# Altium PCB B302CA-PCIe.PcbDoc
Units mm, origin at the board's own origin, x right, y up, seen from the top; angles counter-clockwise.
Board outline 30 x 50.95 mm, 4 copper layers (Top Layer, Inner Layer 1, Inner Layer 2, Bottom Layer), stack 0.973 mm thick; 36 components, 27 nets, 160 pads, 77 vias.
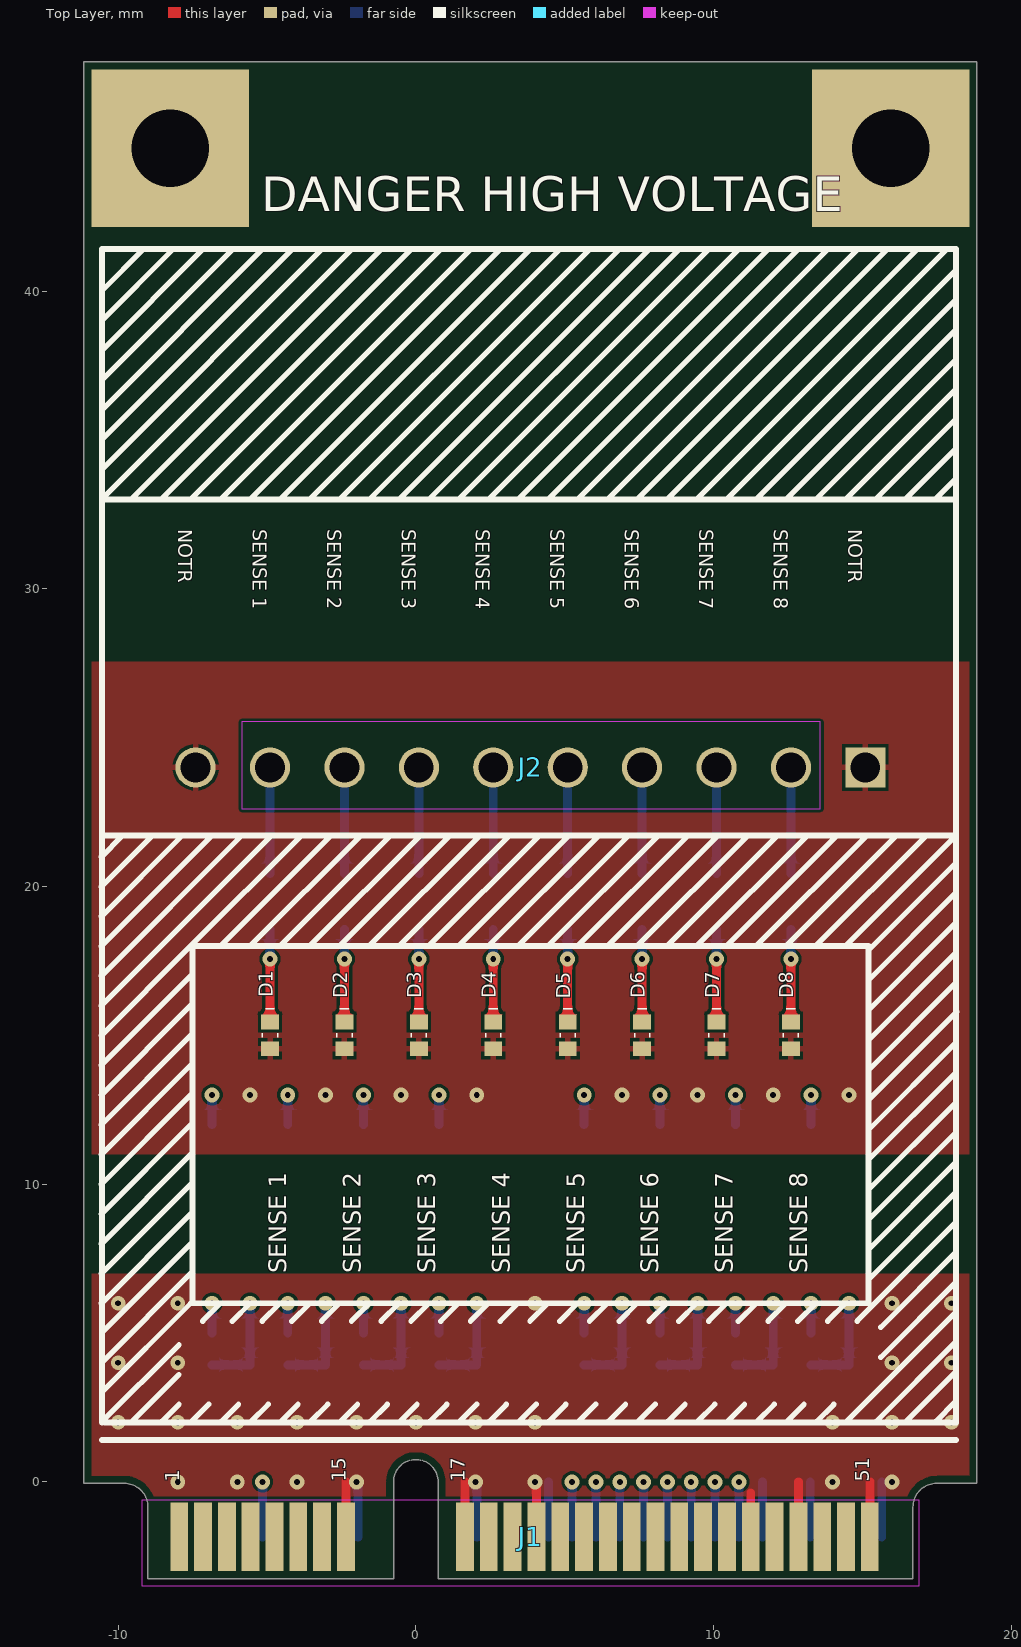
[diagram p0: Top Layer view]
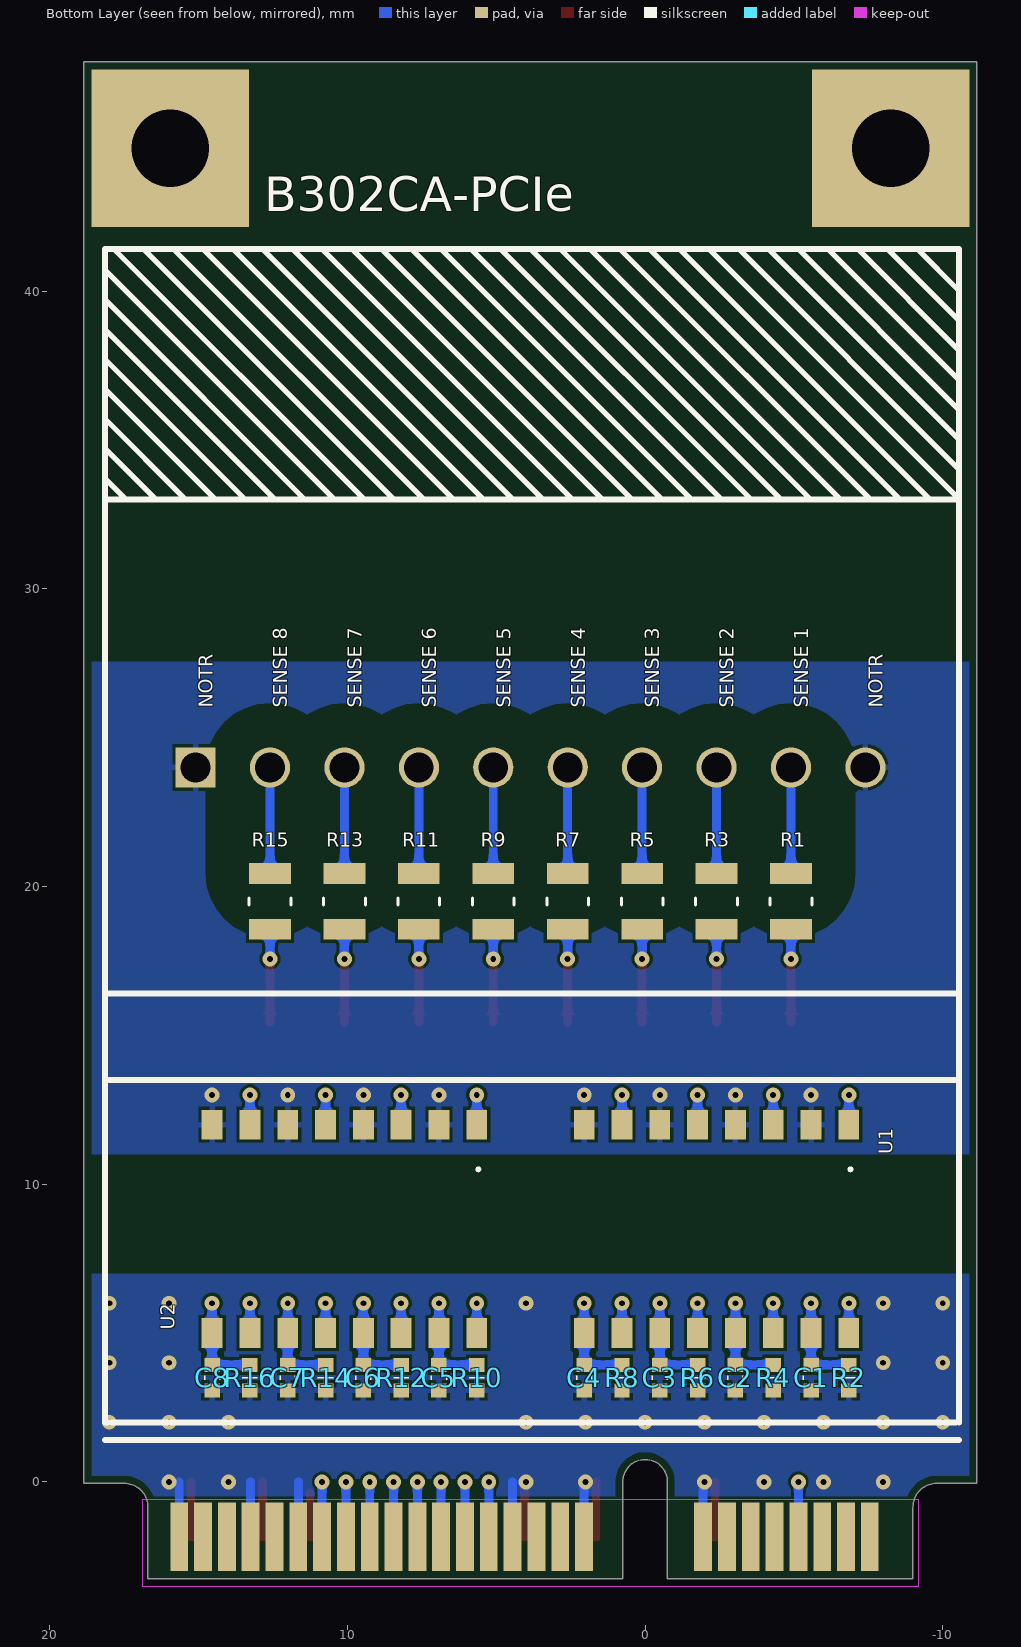
[diagram p1: Bottom Layer view, seen from below]
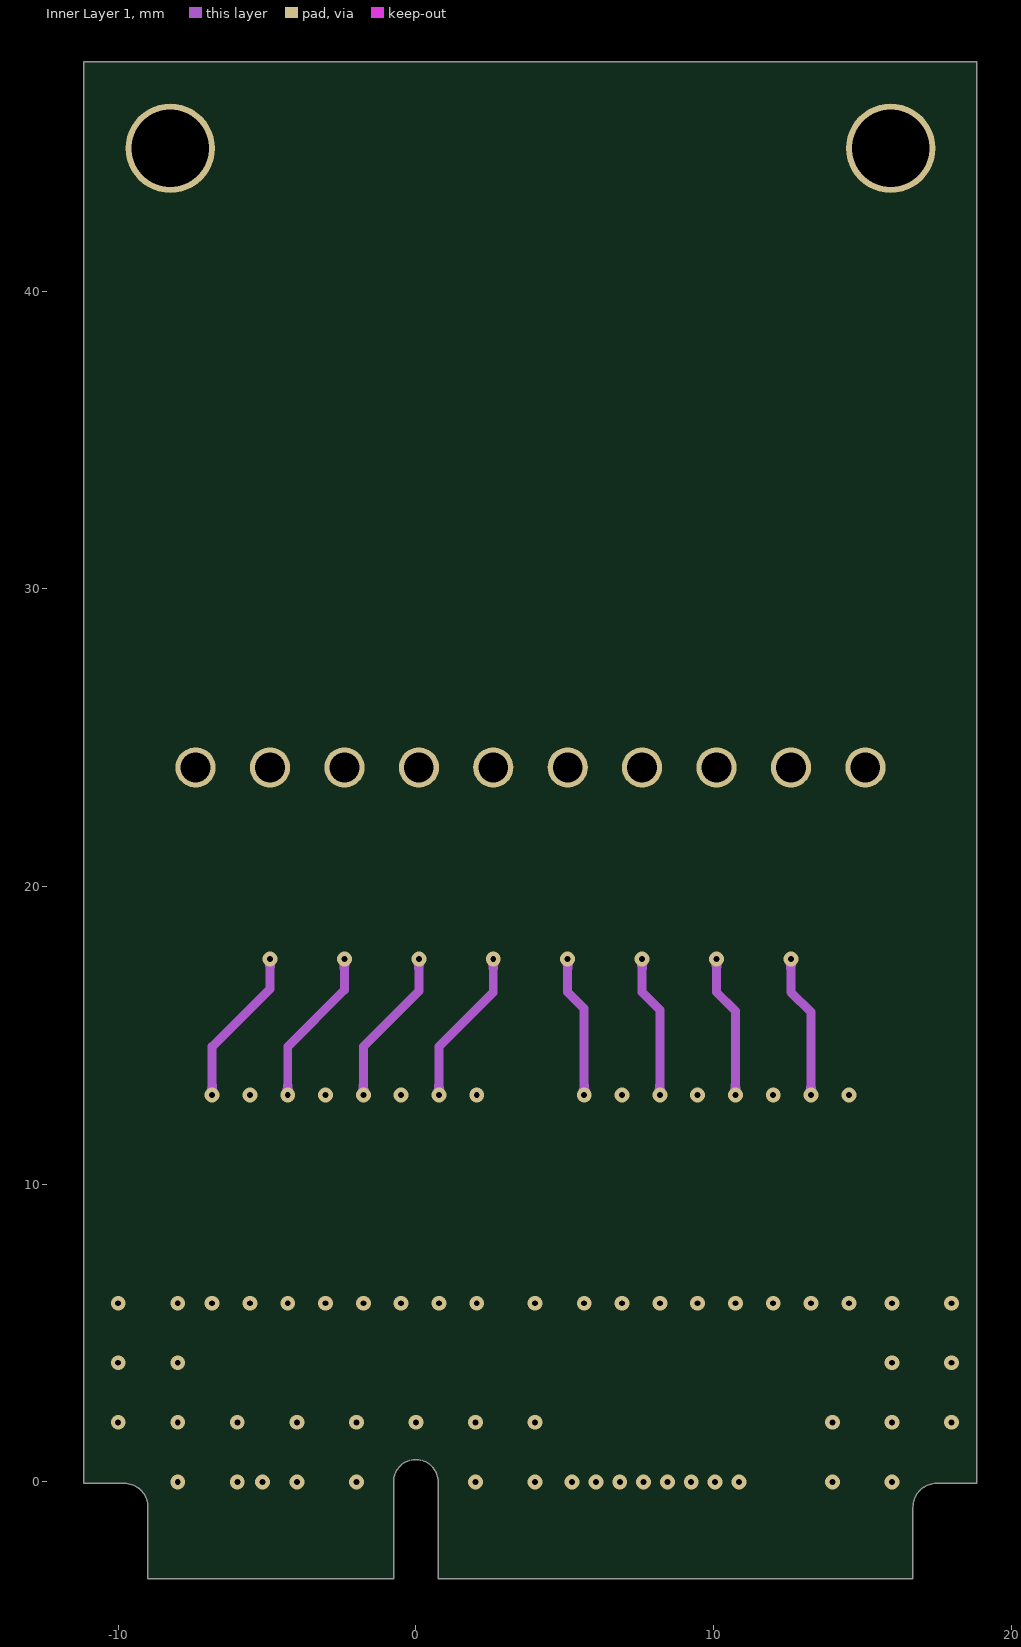
[diagram p2: Inner Layer 1]
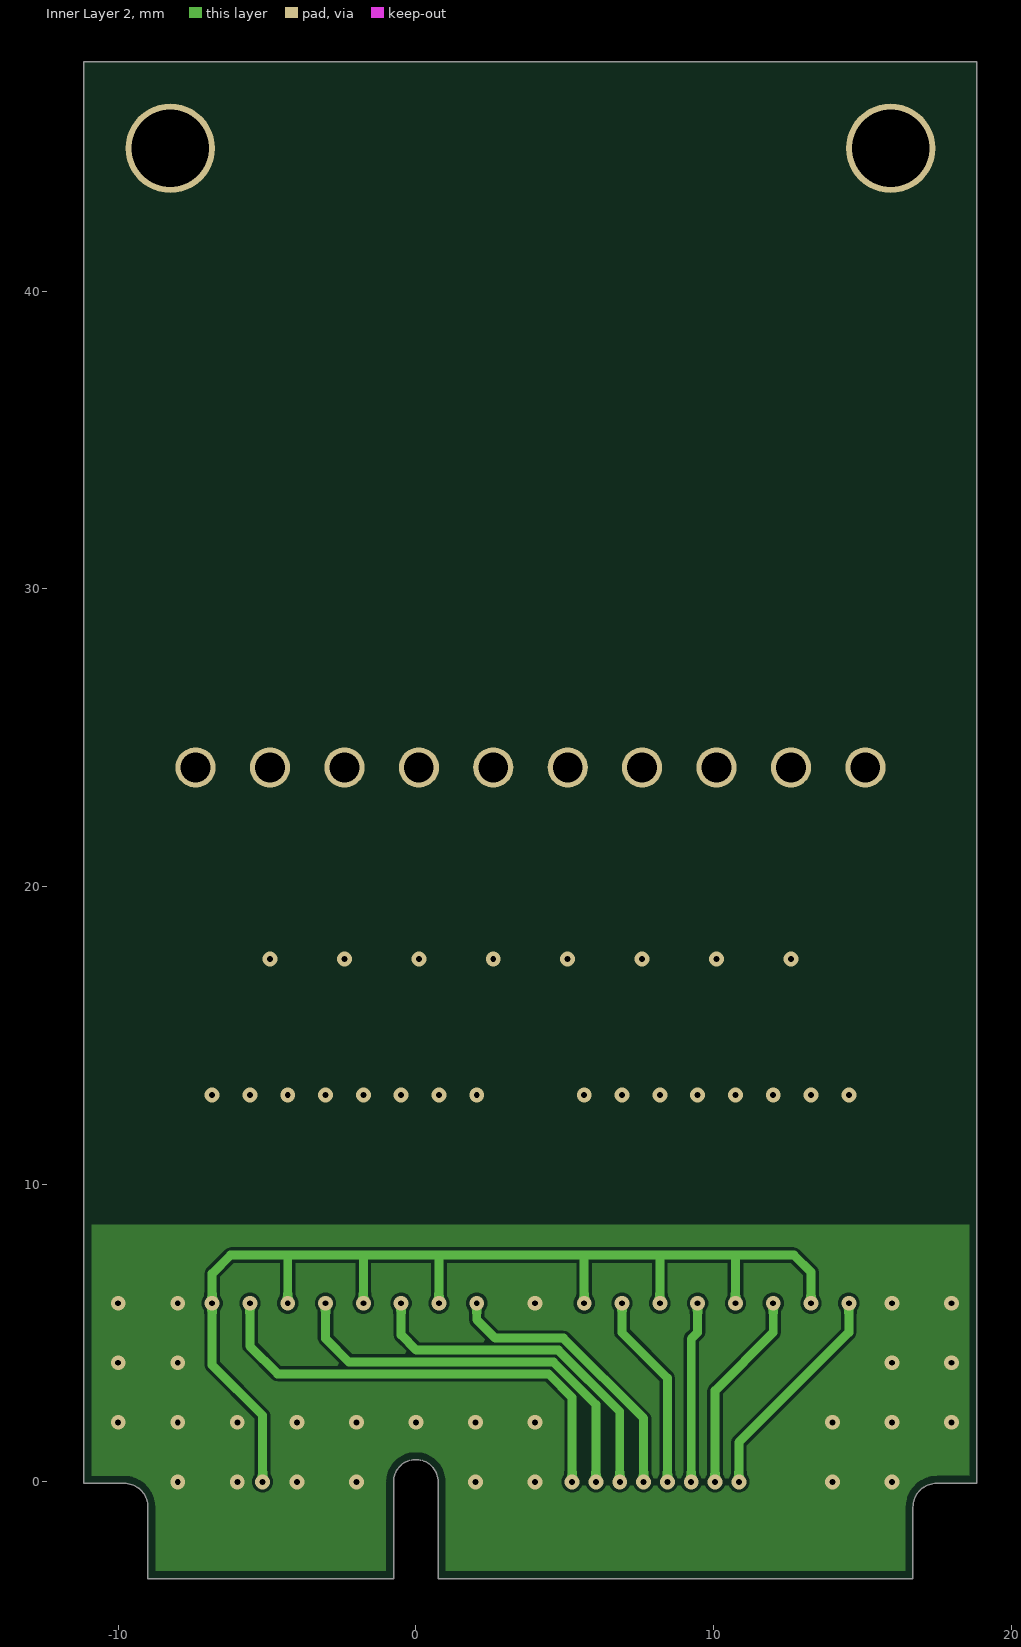
[diagram p3: Inner Layer 2]
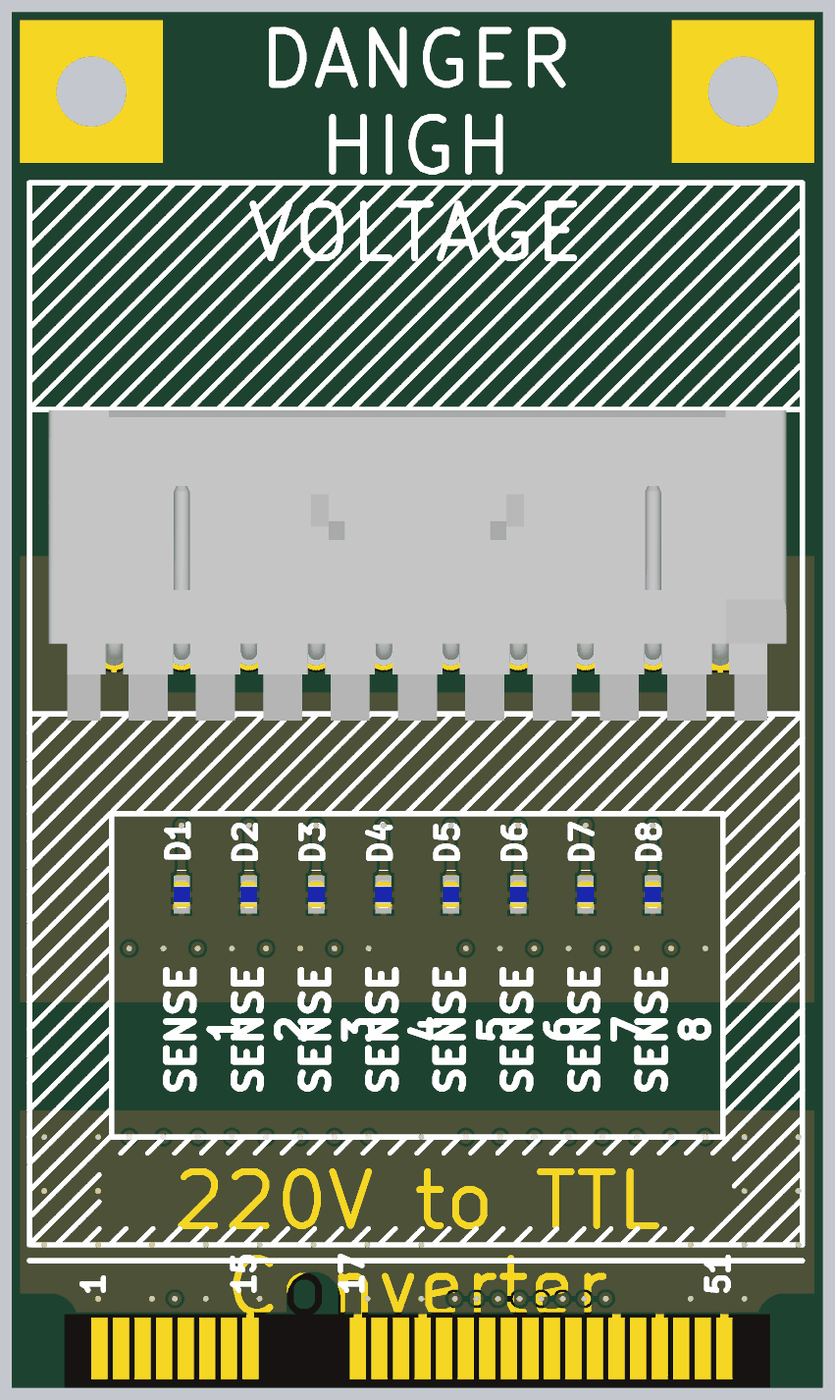
[diagram p4: 3D render of the assembled board from above, using the file's embedded part models]
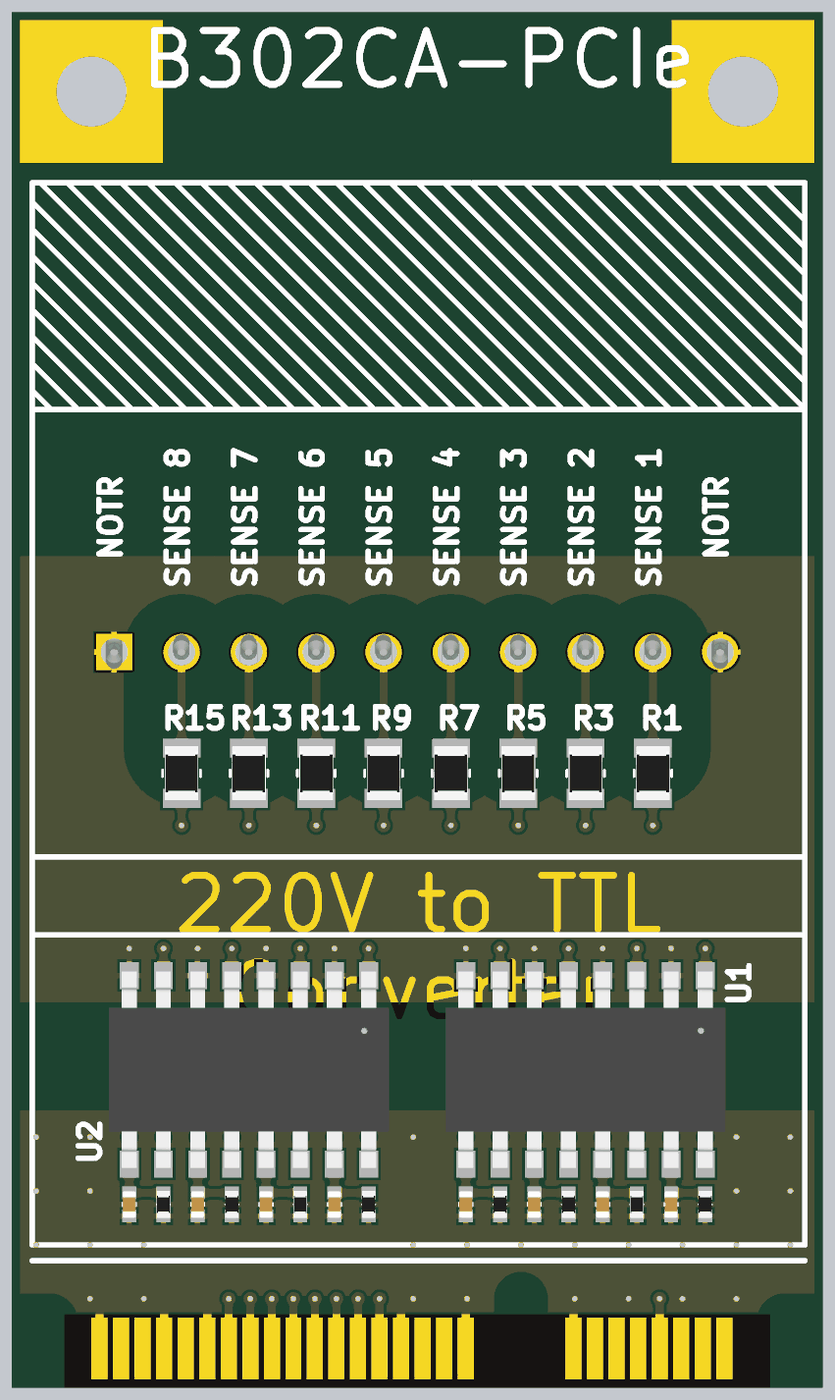
[diagram p5: 3D render of the assembled board from below, using the file's embedded part models]

## Layer stack, top to bottom
Top Solder: solder mask 0.0254, SM-001, Dk 4
Top Layer: signal copper 0.035
Dielectric 2: prepreg 0.1118, PP-015, Dk 4.3
Inner Layer 1: signal copper 0.035
Dielectric 1: core 0.6096, Core-038, Dk 4.6
Inner Layer 2: signal copper 0.035
Dielectric 3: prepreg 0.1118, PP-015, Dk 4.3
Bottom Layer: signal copper 0.035
Bottom Solder: solder mask 0.0254, SM-001, Dk 4

## Board outline
-9,-3.25 -9,-0.85 ccw(c-9.8,-0.85) -9.8,-0.05 -11.15,-0.05 -11.15,47.7 18.85,47.7 18.85,-0.05 17.5,-0.05 ccw(c17.5,-0.85) 16.7,-0.85 16.7,-3.25 0.75,-3.25 0.75,0 ccw(c0,0) -0.75,0 -0.75,-3.25

## Design rules (kind name [scope] priority, off if disabled: settings)
BoardOutlineClearance [All] p1: gap=0.25 ignorepadtopadclearanceinfootprint=FALSE except(0: Arc-SplitContinuation Track-SplitContinuation SMDPad-SplitContinuation THPad-SplitContinuation Via-SplitContinuation Fill-SplitContinuation Poly-SplitContinuation Region-SplitContinuation Text-SplitContinuation)
Clearance "Schematic Clearance Constraint" [InNetClass('HV')] p1: gap=0.254 ignorepadtopadclearanceinfootprint=FALSE except(0: Arc-Hole Track-Hole SMDPad-Hole THPad-Hole Via-Hole Fill-Hole Poly-Hole Region-Hole Text-Hole; 1: Arc-Arc Arc-Track Track-Track; 2: Arc-Fill Arc-Poly Arc-Region Track-Fill Track-Poly Track-Region)
Clearance Clearance-xPP-xTP-xTT [All] p2: gap=0.1 ignorepadtopadclearanceinfootprint=FALSE except(0: Arc-Hole Track-Hole SMDPad-Hole THPad-Hole Via-Hole Fill-Hole Poly-Hole Region-Hole Text-Hole)
ComponentClearance [All] p1: gap=0.25 collisioncheckmode=3 verticalgap=0.25 showdistances=FALSE
DiffPairsRouting [All] p1: maxlimit=0.25 minlimit=0.25 mostfreqgap=0.25 toplayer_minwidth=0.381 toplayer_maxwidth=0.381 toplayer_prefwidth=0.381 midlayer1_minwidth=0.381 midlayer1_maxwidth=0.381 midlayer1_prefwidth=0.381 midlayer2_minwidth=0.381 midlayer2_maxwidth=0.381 midlayer2_prefwidth=0.381 bottomlayer_minwidth=0.381 bottomlayer_maxwidth=0.381 bottomlayer_prefwidth=0.381 maxuncoupledlength=12.5
Height [All] p1: minheight=0 maxheight=25 prefheight=12.5
HoleSize HoleSize-PTH [All] p1: absolutevalues=TRUE maxlimit=5 minlimit=0.15 maxpercent=80.000 minpercent=20.000
HoleToHoleClearance [All] p1: gap=0.35 allowstackedmicrovias=TRUE
MinimumAnnularRing "Minimum IAR  <= 0.45mm" [((ObjectKind = 'Pad') OR (ObjectKind = 'Via')) And (Layer = 'MultiLayer') And (HoleDiameter <= AsMM(0.45))] p1: minimumring=0.125 // minimum inner annular ring for pads <= 0.45mm finished hole size
MinimumAnnularRing "Minimum IAR  > 0.45mm" [((ObjectKind = 'Pad') OR (ObjectKind = 'Via')) And (Layer = 'MultiLayer') And (HoleDiameter > AsMM(0.45))] p2: minimumring=0.125 // minimum inner annular ring for pads > 0.45mm finished hole size
MinimumAnnularRing Minimum-IAR [All] p3: minimumring=0.125
MinimumSolderMaskSliver [All] p1: minsoldermaskwidth=0.08
PlaneClearance [InNet('ANT_GSM')] p1: clearance=0.05
PlaneClearance PlaneClearance-IPI [All] p2: clearance=0.25
PlaneConnect [All] p1: planeconnectstyle=Relief reliefexpansion=0.175 reliefentries=4 reliefconductorwidth=0.2 reliefairgap=0.1
PolygonConnect PolygonConnect_Via [All vs (ObjectKind = 'Via') And (HoleDiameter <= AsMM(0.45))] p1: connectstyle=Direct reliefconductorwidth=0.254 reliefentries=4 polygonreliefangle="90 Angle" airgapwidth=0.254
PolygonConnect PolygonConnect-xTW [All] p2: connectstyle=Relief reliefconductorwidth=0.2 reliefentries=4 polygonreliefangle="90 Angle" airgapwidth=0.1
RoutingCorners [All] p1: cornerstyle=45-Degree minsetback=2.5 maxsetback=2.5
RoutingVias "RoutingVias <= 0.45mm" [(ObjectKind = 'Via') And (HoleDiameter <= AsMM(0.45))] p1: holewidth=0.2 width=0.55 viastyle="Through Hole" minholewidth=0.15 minwidth=0.5 maxholewidth=0.45 maxwidth=0.8
RoutingVias "RoutingVias > 0.45mm" [(ObjectKind = 'Via') And (HoleDiameter > AsMM(0.45))] p2: holewidth=0.5 width=0.85 viastyle="Through Hole" minholewidth=0.5 minwidth=0.85 maxholewidth=0.9 maxwidth=1.25
SilkToSilkClearance [All] p1: silktosilkclearance=0.2
SilkToSolderMaskClearance SilkscreenOverComponentPads [IsPad] p1: minsilkscreentomaskgap=0.1 clearancetoexposedcopper=TRUE
SolderMaskExpansion SolderMaskExpansion_Via [(ObjectKind = 'Via') And (HoleDiameter <= AsMM(0.45))] p1: expansion=0.01 istentingtop=TRUE soldermaskfromhole=TRUE
SolderMaskExpansion [All] p2: expansion=0.01 istentingtop=FALSE
SupplyNets "Schematic Supply Nets_2" [InNetClass('HV')] p1: voltage=220,0
SupplyNets "Schematic Supply Nets" [InNet('3V3')] p2: voltage=3,300
UnRoutedNet [All] p1: checkbadconnections=TRUE
Width Width-xTW [All] p1: maxlimit=1.5 minlimit=0.1 preferedwidth=0.2
18 further rules are at their usual default settings.

## Classes and differential pairs
net class HV: 220V_SENSE_1 220V_SENSE_2 220V_SENSE_3 220V_SENSE_4 220V_SENSE_5 220V_SENSE_6 220V_SENSE_7 220V_SENSE_8
component class "Optic Isolator 8": C8 D8 R15 R16
component class "Optic Isolator 7": C7 D7 R13 R14
component class "Optic Isolator 6": C6 D6 R11 R12
component class "Optic Isolator 5": C5 D5 R9 R10 U2
component class "Optic Isolator 4": C4 D4 R7 R8
component class "Optic Isolator 3": C3 D3 R5 R6
component class "Optic Isolator 2": C2 D2 R3 R4
component class "Optic Isolator 1": C1 D1 R1 R2 U1
component class "220V Sense Inputs": J2
component class "Card Edge Connector": J1

## Components (designator, comment, footprint, x,y, rotation, side; value= is the part's Value field where it differs from the comment)
C1 "Capacitor - 4.7uF [0402] (Ceramic)" CAPACITOR_0402 -5.575,3.5 r90 bottom value=4.7uF
C2 "Capacitor - 4.7uF [0402] (Ceramic)" CAPACITOR_0402 -3.035,3.5 r90 bottom value=4.7uF
C3 "Capacitor - 4.7uF [0402] (Ceramic)" CAPACITOR_0402 -0.495,3.5 r90 bottom value=4.7uF
C4 "Capacitor - 4.7uF [0402] (Ceramic)" CAPACITOR_0402 2.045,3.5 r90 bottom value=4.7uF
C5 "Capacitor - 4.7uF [0402] (Ceramic)" CAPACITOR_0402 6.925,3.5 r90 bottom value=4.7uF
C6 "Capacitor - 4.7uF [0402] (Ceramic)" CAPACITOR_0402 9.465,3.5 r90 bottom value=4.7uF
C7 "Capacitor - 4.7uF [0402] (Ceramic)" CAPACITOR_0402 12.005,3.5 r90 bottom value=4.7uF
C8 "Capacitor - 4.7uF [0402] (Ceramic)" CAPACITOR_0402 14.545,3.5 r90 bottom value=4.7uF
D1 "SMD LED (Green)" LED_0402 -4.9,15 r270 top
D2 "SMD LED (Green)" LED_0402 -2.4,15 r270 top
D3 "SMD LED (Green)" LED_0402 0.1,15 r270 top
D4 "SMD LED (Green)" LED_0402 2.6,15 r270 top
D5 "SMD LED (Green)" LED_0402 5.1,15 r270 top
D6 "SMD LED (Green)" LED_0402 7.6,15 r270 top
D7 "SMD LED (Green)" LED_0402 10.1,15 r270 top
D8 "SMD LED (Green)" LED_0402 12.6,15 r270 top
J1 "Connector - Mini PCI-E [Add-on]" "PCB - Mini PCI Express" 0,0 r0 top
J2 "53426-1010" "Connector 10P (2.54)" 3.85,24 r180 top
R1 "220K - 0805 - %5 - 1/16W" RESISTOR_0805 -4.9,19.5 r90 bottom value=220K
R2 "47K - 0402 - %1 - 1/16W" RESISTOR_0402 -6.845,3.5 r90 bottom value=47K
R3 "220K - 0805 - %5 - 1/16W" RESISTOR_0805 -2.4,19.5 r90 bottom value=220K
R4 "47K - 0402 - %1 - 1/16W" RESISTOR_0402 -4.305,3.5 r90 bottom value=47K
R5 "220K - 0805 - %5 - 1/16W" RESISTOR_0805 0.1,19.5 r90 bottom value=220K
R6 "47K - 0402 - %1 - 1/16W" RESISTOR_0402 -1.765,3.5 r90 bottom value=47K
R7 "220K - 0805 - %5 - 1/16W" RESISTOR_0805 2.6,19.5 r90 bottom value=220K
R8 "47K - 0402 - %1 - 1/16W" RESISTOR_0402 0.775,3.5 r90 bottom value=47K
R9 "220K - 0805 - %5 - 1/16W" RESISTOR_0805 5.1,19.5 r90 bottom value=220K
R10 "47K - 0402 - %1 - 1/16W" RESISTOR_0402 5.655,3.5 r90 bottom value=47K
R11 "220K - 0805 - %5 - 1/16W" RESISTOR_0805 7.6,19.5 r90 bottom value=220K
R12 "47K - 0402 - %1 - 1/16W" RESISTOR_0402 8.195,3.5 r90 bottom value=47K
R13 "220K - 0805 - %5 - 1/16W" RESISTOR_0805 10.1,19.5 r90 bottom value=220K
R14 "47K - 0402 - %1 - 1/16W" RESISTOR_0402 10.735,3.5 r90 bottom value=47K
R15 "220K - 0805 - %5 - 1/16W" RESISTOR_0805 12.6,19.5 r90 bottom value=220K
R16 "47K - 0402 - %1 - 1/16W" RESISTOR_0402 13.275,3.5 r90 bottom value=47K
U1 "TCMT4100" SO-16 -2.4,8.5 r270 bottom
U2 "TCMT4100" SO-16 10.1,8.5 r270 bottom

## Footprints (in the part's own frame and the unit in brackets; to place one, negate y for a bottom-side part, rotate by r counter-clockwise, add the part's x,y. Pads: shape width x height; smd on the part's side, far side on the other; paste and mask are expansions set on the pad)
CAPACITOR_0402 [mm] "Chip Capacitor, IPC High Density"
  rect 0.47x0.52 smd mask+0.01: 1(-0.43,0) 2(0.43,0)
  silkscreen extent -0.06,-0.25 0.06,0.25, body extent -0.5,-0.25 0.5,0.25, height 0.49
"Connector 10P (2.54)" [mm] "10P Tunic Connector"
  rect 1.35x1.35 / inner round 1.35 / far side rect 1.35x1.35 hole 1 mask+0.076: 1(-11.25,0)
  round 1.35 hole 1 mask+0.076: 2(-8.75,0) 3(-6.25,0) 4(-3.75,0) 5(-1.25,0) 6(1.25,0) 7(3.75,0) 8(6.25,0) 9(8.75,0) 10(11.25,0)
  body extent -13.71,-8.96 13.69,2.54, height 6.65
LED_0402 [mm] "LED, IPC High Density"
  rect 0.5x0.6 smd mask+0.01: 1(-0.45,0) 2(0.45,0)
  silkscreen extent -0.9,-0.25 0.06,0.25, body extent -0.5,-0.3 0.5,0.3, height 0.18
"PCB - Mini PCI Express" [mm]
  rect 0.6x2.3 smd paste-0.9: 1(-7.95,-1.85) 3(-7.15,-1.85) 5(-6.35,-1.85) 7(-5.55,-1.85) 9(-4.75,-1.85) 11(-3.95,-1.85) 13(-3.15,-1.85) 15(-2.35,-1.85) 17(1.65,-1.85) 19(2.45,-1.85) 21(3.25,-1.85) 23(4.05,-1.85) 25(4.85,-1.85) 27(5.65,-1.85) 29(6.45,-1.85) 31(7.25,-1.85) 33(8.05,-1.85) 35(8.85,-1.85) 37(9.65,-1.85) 39(10.45,-1.85) 41(11.25,-1.85) 43(12.05,-1.85) 45(12.85,-1.85) 47(13.65,-1.85) 49(14.45,-1.85) 51(15.25,-1.85)
  rect 0.6x2.3 smd far side paste-0.9: 2(-7.55,-1.85) 4(-6.75,-1.85) 6(-5.95,-1.85) 8(-5.15,-1.85) 10(-4.35,-1.85) 12(-3.55,-1.85) 14(-2.75,-1.85) 16(-1.95,-1.85) 18(2.05,-1.85) 20(2.85,-1.85) 22(3.65,-1.85) 24(4.45,-1.85) 26(5.25,-1.85) 28(6.05,-1.85) 30(6.85,-1.85) 32(7.65,-1.85) 34(8.45,-1.85) 36(9.25,-1.85) 38(10.05,-1.85) 40(10.85,-1.85) 42(11.65,-1.85) 44(12.45,-1.85) 46(13.25,-1.85) 48(14.05,-1.85) 50(14.85,-1.85) 52(15.65,-1.85)
  Top Layer keep-out region: -9.2,-0.6 16.9,-0.6 16.9,-3.5 -9.2,-3.5
  Bottom Layer keep-out region: -9.2,-0.6 16.9,-0.6 16.9,-3.5 -9.2,-3.5
RESISTOR_0402 [mm] "Chip Resistor, IPC High Density"
  rect 0.47x0.52 smd mask+0.01: 1(-0.43,0) 2(0.43,0)
  silkscreen extent 0,-0.25 0,0.25, body extent -0.5,-0.25 0.5,0.25, height 0.35
RESISTOR_0805 [mm] "Chip Resistor, IPC High Density"
  rect 0.7x1.4 smd mask+0.01: 1(-0.935,0) 2(0.935,0)
  silkscreen extent -0.12,-0.7 0.12,0.7, body extent -1,-0.63 1,0.63, height 0.45
SO-16 [mm]
  rect 1x0.7 smd mask+0.01: 1(-3.5,4.445) 2(-3.5,3.175) 3(-3.5,1.905) 4(-3.5,0.635) 5(-3.5,-0.635) 6(-3.5,-1.905) 7(-3.5,-3.175) 8(-3.5,-4.445) 9(3.5,-4.445) 10(3.5,-3.175) 11(3.5,-1.905) 12(3.5,-0.635) 13(3.5,0.635) 14(3.5,1.905) 15(3.5,3.175) 16(3.5,4.445)
  silkscreen extent -2.05,4.45 -1.95,4.55, body extent -3.64,-5.19 3.64,5.19, height 2.11

## Part data
C1 C2 C3 C4 C5 C6 C7 C8: library part "Capacitor - 4.7uF [0402-6V3]", "Multilayer Ceramic Capacitors - SMD - 6V3 4.7uF X5R 0402 20%", Case=0402, Manufacturer Name=KEMET, Manufacturer Part Number=C0402C475M9PACTU, Tolerance=20%, Voltage=6V3
D1 D2 D3 D4 D5 D6 D7 D8: library part "Diode - LED (0402-Green)", "Standard LEDs - SMD MINI-MOLD ULTRA COMPACT GREEN", Case=0402, Color=Green, Manufacturer Name="ROHM Semiconductor", Manufacturer Part Number=SML-P12MTT86R, ComponentLink1Description=DataSheet, ComponentLink1URL=https://www.mouser.com.tr/datasheet/2/348/sml-p1-e-1139198.pdf, ComponentLink2Description=Mouser, ComponentLink2URL=https://www.mouser.com.tr/ProductDetail/ROHM-Semiconductor/SML-P12U2TT86R?qs=sGAEpiMZZMseGfSY3csMkRIBDsfU3UCXJTULB5gem9Ta%252Bp%252BvZ709fg%3D%3D, RoHS=Yes
J1: "Mini PCI-Express gold finger connector.", BUS Type="Mini PCI Express", Mating Connector=TE-1775862-2, Number of Positions=52, Pitch="0.8 mm", System=Connector
J2: library part "Connector - Tunic 10P (2.5)", "2.50mm Pitch Mini-Lock Wire-to-Board Header Right Angle Friction and Positive Lock 10 Circuits", Case=TH, Manufacturer Name=Molex, Manufacturer Part Number=53426-1010, Pitch=2.5mm, Position="10 Position", System=Connector
R1 R3 R5 R7 R9 R11 R13 R15: library part "Resistor - 220K [0805]", "Thick Film Resistors - SMD 1/2 W 220 KOhm 5%", Case=0805, Manufacturer Name="Vishay Dale", Manufacturer Part Number=CRCW0805220KJNEAHP, Power=1/2W, Tolerance=%5, ComponentLink1Description=DataSheet, ComponentLink1URL=https://www.mouser.com.tr/datasheet/2/427/dcrcwe3-1762152.pdf, ComponentLink2Description=Mouser, ComponentLink2URL=https://www.mouser.com.tr/ProductDetail/Vishay-Dale/CRCW0402330RFKED?qs=sGAEpiMZZMu61qfTUdNhG2DpbjADlD3GGS6SwBlLi5Q%3D
R2 R4 R6 R8 R10 R12 R14 R16: library part "Resistor - 47K [0402]", "Thick Film Resistors - SMD 1/16 W 47 KOhm 1%", Case=0402, Manufacturer Name=Vishay, Manufacturer Part Number=CRCW040247K0FKED, Power=1/16W, Tolerance=%1, ComponentLink1Description=DataSheet, ComponentLink1URL=https://www.mouser.com.tr/datasheet/2/427/dcrcwe3-1762152.pdf, ComponentLink2Description=Mouser, ComponentLink2URL=https://www.mouser.com.tr/ProductDetail/Vishay-Dale/CRCW040247K0FKED?qs=sGAEpiMZZMu61qfTUdNhG2DpbjADlD3GL%252B3h1elTxqU%3D
U1 U2: library part "IC - TCMT4100", "OptpCoupler 4CH 16 Pin (SOP16)", Case=SOP-16, Manufacturer Name="Vishay Semiconductors", Maximum Collector Emitter Saturation Voltage="0.3 V", Vf - Forward Voltage="1.6 V", If - Forward Current="60 mA", Manufacturer Part Number=TCMT4100, Number of Channels="4 Channel"

## Free pads (board coordinates)
  rect 5.3x5.3 / inner round 3 / far side rect 5.3x5.3 hole 2.6: 1(-8.25,44.8) 2(15.95,44.8)

## Via types
v1: diameter 0.5, hole 0.2, Top Layer to Bottom Layer, tented both sides, 77 vias

## Nets (pads, with @x,y where several pads share a name; then routed paths per layer and width w, separated by ;. In a path a pad name is that pad's centre, name@x,y a point inside that pad or via, vN(x,y) a via of type N, cw(c..) or ccw(c..) an arc to the next point about the centre after c; other vN are vias at no path point)
3V3: J1.8 U1.10 U1.12 U1.14 U1.16 U2.10 U2.12 U2.14 U2.16 | length 48.9
  Inner Layer 2 w0.3: v1(-5.15,0) -5.15,2.229 -6.845,3.924 v1(-6.845,6) -6.845,6.998 -6.223,7.62 -4.318,7.62 ; v1(-4.305,6) -4.305,7.607 -4.318,7.62 ; v1(-1.765,6) -1.765,7.607 ; v1(0.775,6) 0.775,7.607 ; v1(5.655,6) 5.655,7.607 ; v1(8.195,6) 8.195,7.607 ; v1(10.735,6) 10.735,7.607 ; v1(13.275,6) 13.275,7.045 12.7,7.62 -4.318,7.62
  Bottom Layer w0.3: U1.16 v1(-6.845,6) ; J1.8 v1(-5.15,0) ; U1.14 v1(-4.305,6) ; U1.12 v1(-1.765,6) ; U1.10 v1(0.775,6) ; U2.16 v1(5.655,6) ; U2.14 v1(8.195,6) ; U2.12 v1(10.735,6) ; U2.10 v1(13.275,6)
3V3_SENSE_1: C1.2 J1.26 R2.2 U1.15 | length 21
  Inner Layer 2 w0.3: v1(-5.575,6) -5.575,4.559 -4.642,3.626 4.456,3.626 5.25,2.832 v1(5.25,0)
  Bottom Layer w0.3: R2.2 C1.2 U1.15 v1(-5.575,6) ; J1.26 v1(5.25,0)
3V3_SENSE_2: C2.2 J1.28 R4.2 U1.13 | length 19
  Inner Layer 2 w0.3: v1(-3.035,6) -3.035,4.813 -2.248,4.026 4.622,4.026 6.05,2.598 v1(6.05,0)
  Bottom Layer w0.3: R4.2 C2.2 U1.13 v1(-3.035,6) ; J1.28 v1(6.05,0)
3V3_SENSE_3: C3.2 J1.30 R6.2 U1.11 | length 17
  Inner Layer 2 w0.3: v1(-0.495,6) -0.495,4.94 0.019,4.426 4.787,4.426 6.85,2.363 v1(6.85,0)
  Bottom Layer w0.3: R6.2 C3.2 U1.11 v1(-0.495,6) ; J1.30 v1(6.85,0)
3V3_SENSE_4: C4.2 J1.32 R8.2 U1.9 | length 14.9
  Inner Layer 2 w0.3: v1(2.045,6) 2.045,5.448 2.667,4.826 4.953,4.826 7.65,2.129 v1(7.65,0)
  Bottom Layer w0.3: R8.2 C4.2 U1.9 v1(2.045,6) ; J1.32 v1(7.65,0)
3V3_SENSE_5: C5.2 J1.34 R10.2 U2.15 | length 11.8
  Inner Layer 2 w0.3: v1(6.925,6) 6.925,5.013 8.45,3.488 v1(8.45,0)
  Bottom Layer w0.3: R10.2 C5.2 U2.15 v1(6.925,6) ; J1.34 v1(8.45,0)
3V3_SENSE_6: C6.2 J1.36 R12.2 U2.13 | length 11.3
  Inner Layer 2 w0.3: v1(9.25,0) 9.25,4.805 9.465,5.02 v1(9.465,6)
  Bottom Layer w0.3: R12.2 C6.2 U2.13 v1(9.465,6) ; J1.36 v1(9.25,0)
3V3_SENSE_7: C7.2 J1.38 R14.2 U2.11 | length 12
  Inner Layer 2 w0.3: v1(10.05,0) 10.05,3.065 12.005,5.02 v1(12.005,6)
  Bottom Layer w0.3: J1.38 v1(10.05,0) ; R14.2 C7.2 U2.11 v1(12.005,6)
3V3_SENSE_8: C8.2 J1.40 R16.2 U2.9 | length 12.7
  Inner Layer 2 w0.3: v1(10.85,0) 10.85,1.325 14.545,5.02 v1(14.545,6)
  Bottom Layer w0.3: J1.40 v1(10.85,0) ; R16.2 C8.2 U2.9 v1(14.545,6)
220V_SENSE_1: J2.9 R1.2 | length 3.6
  Bottom Layer w0.3: R1.2 J2.9
220V_SENSE_1_: D1.1 R1.1 U1.1 | length 9.5
  Top Layer w0.3: D1.1 v1(-4.9,17.565)
  Inner Layer 1 w0.3: v1(-6.845,13) -6.845,14.618 -4.9,16.563 v1(-4.9,17.565)
  Bottom Layer w0.3: U1.1 v1(-6.845,13) ; v1(-4.9,17.565) R1.1
220V_SENSE_2: J2.8 R3.2 | length 3.6
  Bottom Layer w0.3: R3.2 J2.8
220V_SENSE_2_: D2.1 R3.1 U1.3 | length 9.5
  Top Layer w0.3: D2.1 v1(-2.4,17.565)
  Inner Layer 1 w0.3: v1(-4.305,13) -4.305,14.618 -2.4,16.523 v1(-2.4,17.565)
  Bottom Layer w0.3: U1.3 v1(-4.305,13) ; v1(-2.4,17.565) R3.1
220V_SENSE_3: J2.7 R5.2 | length 3.6
  Bottom Layer w0.3: R5.2 J2.7
220V_SENSE_3_: D3.1 R5.1 U1.5 | length 9.5
  Top Layer w0.3: D3.1 v1(0.1,17.565)
  Inner Layer 1 w0.3: v1(-1.765,13) -1.765,14.618 0.1,16.483 v1(0.1,17.565)
  Bottom Layer w0.3: U1.5 v1(-1.765,13) ; v1(0.1,17.565) R5.1
220V_SENSE_4: J2.6 R7.2 | length 3.6
  Bottom Layer w0.3: R7.2 J2.6
220V_SENSE_4_: D4.1 R7.1 U1.7 | length 9.4
  Top Layer w0.3: D4.1 v1(2.6,17.565)
  Inner Layer 1 w0.3: v1(0.775,13) 0.775,14.618 2.6,16.443 v1(2.6,17.565)
  Bottom Layer w0.3: U1.7 v1(0.775,13) ; v1(2.6,17.565) R7.1
220V_SENSE_5: J2.5 R9.2 | length 3.6
  Bottom Layer w0.3: R9.2 J2.5
220V_SENSE_5_: D5.1 R9.1 U2.1 | length 8.9
  Top Layer w0.3: D5.1 v1(5.1,17.565)
  Inner Layer 1 w0.3: v1(5.1,17.565) 5.1,16.455 5.655,15.9 v1(5.655,13)
  Bottom Layer w0.3: v1(5.1,17.565) R9.1 ; U2.1 v1(5.655,13)
220V_SENSE_6: J2.4 R11.2 | length 3.6
  Bottom Layer w0.3: R11.2 J2.4
220V_SENSE_6_: D6.1 R11.1 U2.3 | length 8.9
  Top Layer w0.3: D6.1 v1(7.6,17.565)
  Inner Layer 1 w0.3: v1(7.6,17.565) 7.6,16.455 8.195,15.86 v1(8.195,13)
  Bottom Layer w0.3: v1(7.6,17.565) R11.1 ; U2.3 v1(8.195,13)
220V_SENSE_7: J2.3 R13.2 | length 3.6
  Bottom Layer w0.3: R13.2 J2.3
220V_SENSE_7_: D7.1 R13.1 U2.5 | length 8.9
  Top Layer w0.3: D7.1 v1(10.1,17.565)
  Inner Layer 1 w0.3: v1(10.1,17.565) 10.1,16.455 10.735,15.82 v1(10.735,13)
  Bottom Layer w0.3: v1(10.1,17.565) R13.1 ; U2.5 v1(10.735,13)
220V_SENSE_8: J2.2 R15.2 | length 3.6
  Bottom Layer w0.3: R15.2 J2.2
220V_SENSE_8_: D8.1 R15.1 U2.7 | length 9
  Top Layer w0.3: D8.1 v1(12.6,17.565)
  Inner Layer 1 w0.3: v1(12.6,17.565) 12.6,16.455 13.275,15.78 v1(13.275,13)
  Bottom Layer w0.3: v1(12.6,17.565) R15.1 ; U2.7 v1(13.275,13)
GND: C1.1 C2.1 C3.1 C4.1 C5.1 C6.1 C7.1 C8.1 J1.15 J1.16 J1.17 J1.18 J1.23 J1.24 J1.41 J1.42 J1.45 J1.46 J1.51 J1.52 R2.1 R4.1 R6.1 R8.1 R10.1 R12.1 R14.1 R16.1 | length 21.8
  Top Layer w0.3: J1.15 -2.35,0 ; J1.17 1.65,0 ; J1.23 v1@4.05,0 ; J1.41 11.25,-0.381 ; J1.45 12.85,0 ; J1.51 15.25,0
  Bottom Layer w0.3: J1.16 v1@-1.95,0 ; J1.18 v1@2.05,0 ; J1.24 4.45,0 ; J1.42 11.65,0 ; J1.46 13.25,0 ; J1.52 15.65,0
  other v1: -8,0 -6,0 -4,0 -2,0 2,0 4,0 14,0 16,0 -10,2 -8,2 -6,2 -4,2 -2,2 0,2 2,2 4,2 14,2 16,2 18,2 -10,4 -8,4 16,4 18,4 -10,6 -8,6 4,6 16,6 18,6
NOTR: D1.2 D2.2 D3.2 D4.2 D5.2 D6.2 D7.2 D8.2 J2.1 J2.10 U1.2 U1.4 U1.6 U1.8 U2.2 U2.4 U2.6 U2.8
  other v1: -5.575,13 -3.035,13 -0.495,13 2.045,13 6.925,13 9.465,13 12.005,13 14.545,13
pads on no net: J1.1 J1.2 J1.3 J1.4 J1.5 J1.6 J1.7 J1.9 J1.10 J1.11 J1.12 J1.13 J1.14 J1.19 J1.20 J1.21 J1.22 J1.25 J1.27 J1.29 J1.31 J1.33 J1.35 J1.37 J1.39 J1.43 J1.44 J1.47 J1.48 J1.49 J1.50

## Polygon pours and split planes (outlines as drawn)
GND on Bottom Layer "BGND" (solid, pour order 4): -11.15,6.985 18.85,6.985 18.85,-3.25 -11.15,-3.25
NOTR on Bottom Layer "TNOTR" (solid, pour order 3): -11.15,27.559 18.85,27.559 18.85,11 -11.15,11
NOTR on Top Layer "TNOTR" (solid, pour order 2): -11.15,27.559 18.85,27.559 18.85,11 -11.15,11
GND on Top Layer "TGND" (solid, pour order 1): -11.15,6.985 18.85,6.985 18.85,-3.25 -11.15,-3.25
GND on Inner Layer 2 "BGND" (solid, pour order 0): -11.15,8.636 18.85,8.636 18.85,-3.25 -11.15,-3.25

## Keep-outs
Top Layer:
  rectangle: -5.842,22.606 13.589,25.527

## Silkscreen, mask and mechanical layers (free items; w line width, h text height)
Top Overlay:
  drawing of 155 lines, arcs and shapes, not listed
  text "DANGER HIGH VOLTAGE" at -5.2,42.3 h2
  text "NOTR" at -8.15,32 h0.8 r270
  text "SENSE 1" at -5.65,32 h0.8 r270
  text "SENSE 2" at -3.15,32 h0.8 r270
  text "SENSE 3" at -0.65,32 h0.8 r270
  text "SENSE 4" at 1.85,32 h0.8 r270
  text "SENSE 5" at 4.35,32 h0.8 r270
  text "SENSE 6" at 6.85,32 h0.8 r270
  text "SENSE 7" at 9.35,32 h0.8 r270
  text "SENSE 8" at 11.85,32 h0.8 r270
  text "NOTR" at 14.35,32 h0.8 r270
  text "SENSE 1" at -4.15,7 h1 r90
  text "SENSE 2" at -1.65,7 h1 r90
  text "SENSE 3" at 0.85,7 h1 r90
  text "SENSE 4" at 3.35,7 h1 r90
  text "SENSE 5" at 5.85,7 h1 r90
  text "SENSE 6" at 8.35,7 h1 r90
  text "SENSE 7" at 10.85,7 h1 r90
  text "SENSE 8" at 13.35,7 h1 r90
Bottom Overlay:
  lines w0.18: -10.557,33.007 -2.15,41.414 ; -10.55,34.014 -3.15,41.414 ; -10.55,35.014 -4.15,41.414 ; -10.55,36.014 -5.15,41.414 ; -10.55,37.014 -6.15,41.414 ; -10.55,38.014 -7.15,41.414 ; -10.55,39.014 -8.15,41.414 ; -10.55,40.014 -9.15,41.414 ; -9.55,33.014 -1.15,41.414 ; -8.55,33.014 -0.15,41.414 ; -7.55,33.014 0.85,41.414 ; -6.55,33.014 1.85,41.414 ; -5.55,33.014 2.85,41.414 ; -4.55,33.014 3.85,41.414 ; -3.55,33.014 4.85,41.414 ; -2.55,33.014 5.85,41.414 ; -1.55,33.014 6.85,41.414 ; -0.55,33.014 7.85,41.414 ; 0.45,33.014 8.85,41.414 ; 1.45,33.014 9.85,41.414 ; 2.45,33.014 10.85,41.414 ; 3.45,33.014 11.85,41.414 ; 4.45,33.014 12.85,41.414 ; 5.45,33.014 13.85,41.414 ; 6.45,33.014 14.85,41.414 ; 7.45,33.014 15.85,41.414 ; 8.45,33.014 16.85,41.414 ; 9.45,33.014 17.85,41.414 ; 10.45,33.014 18.15,40.714 ; 11.45,33.014 18.15,39.714 ; 12.45,33.014 18.15,38.714 ; 13.45,33.014 18.15,37.714 ; 14.45,33.014 18.15,36.714 ; 15.45,33.014 18.15,35.714 ; 16.45,33.014 18.15,34.714 ; 17.45,33.014 18.15,33.714
  lines w0.2: -10.55,1.413 18.15,1.413 ; -10.55,2 -10.55,41.414 18.15,41.414 18.15,2 -10.452,2 ; -10.55,13.5 18.15,13.5 ; -10.55,16.4 18.15,16.4 ; -10.55,33 18.15,33
  text "B302CA-PCIe" at 12.8,42.3 h2
  text "NOTR" at -8.15,26 h0.8 r270
  text "SENSE 1" at -5.65,26 h0.8 r270
  text "SENSE 2" at -3.15,26 h0.8 r270
  text "SENSE 3" at -0.65,26 h0.8 r270
  text "SENSE 4" at 1.85,26 h0.8 r270
  text "SENSE 5" at 4.35,26 h0.8 r270
  text "SENSE 6" at 6.85,26 h0.8 r270
  text "SENSE 7" at 9.35,26 h0.8 r270
  text "SENSE 8" at 11.85,26 h0.8 r270
  text "NOTR" at 14.35,26 h0.8 r270
Top Solder:
  text "220V to TTL Converter" at -7.501,3.05 h2
Bottom Solder:
  text "220V to TTL Converter" at 17.8,14.05 h2
Board Shape:
  the board outline again, w0.1

## Text inside footprints (layer, text, board x,y; h text height)
J1: Top Overlay "51" at 15.405,0 h0.8 r90; Top Overlay "17" at 1.811,0 h0.8 r90; Top Overlay "15" at -2.195,0 h0.8 r90; Top Overlay "1" at -7.789,0 h0.8 r90